# Allegro board Sensor_RevA-DBG.brd
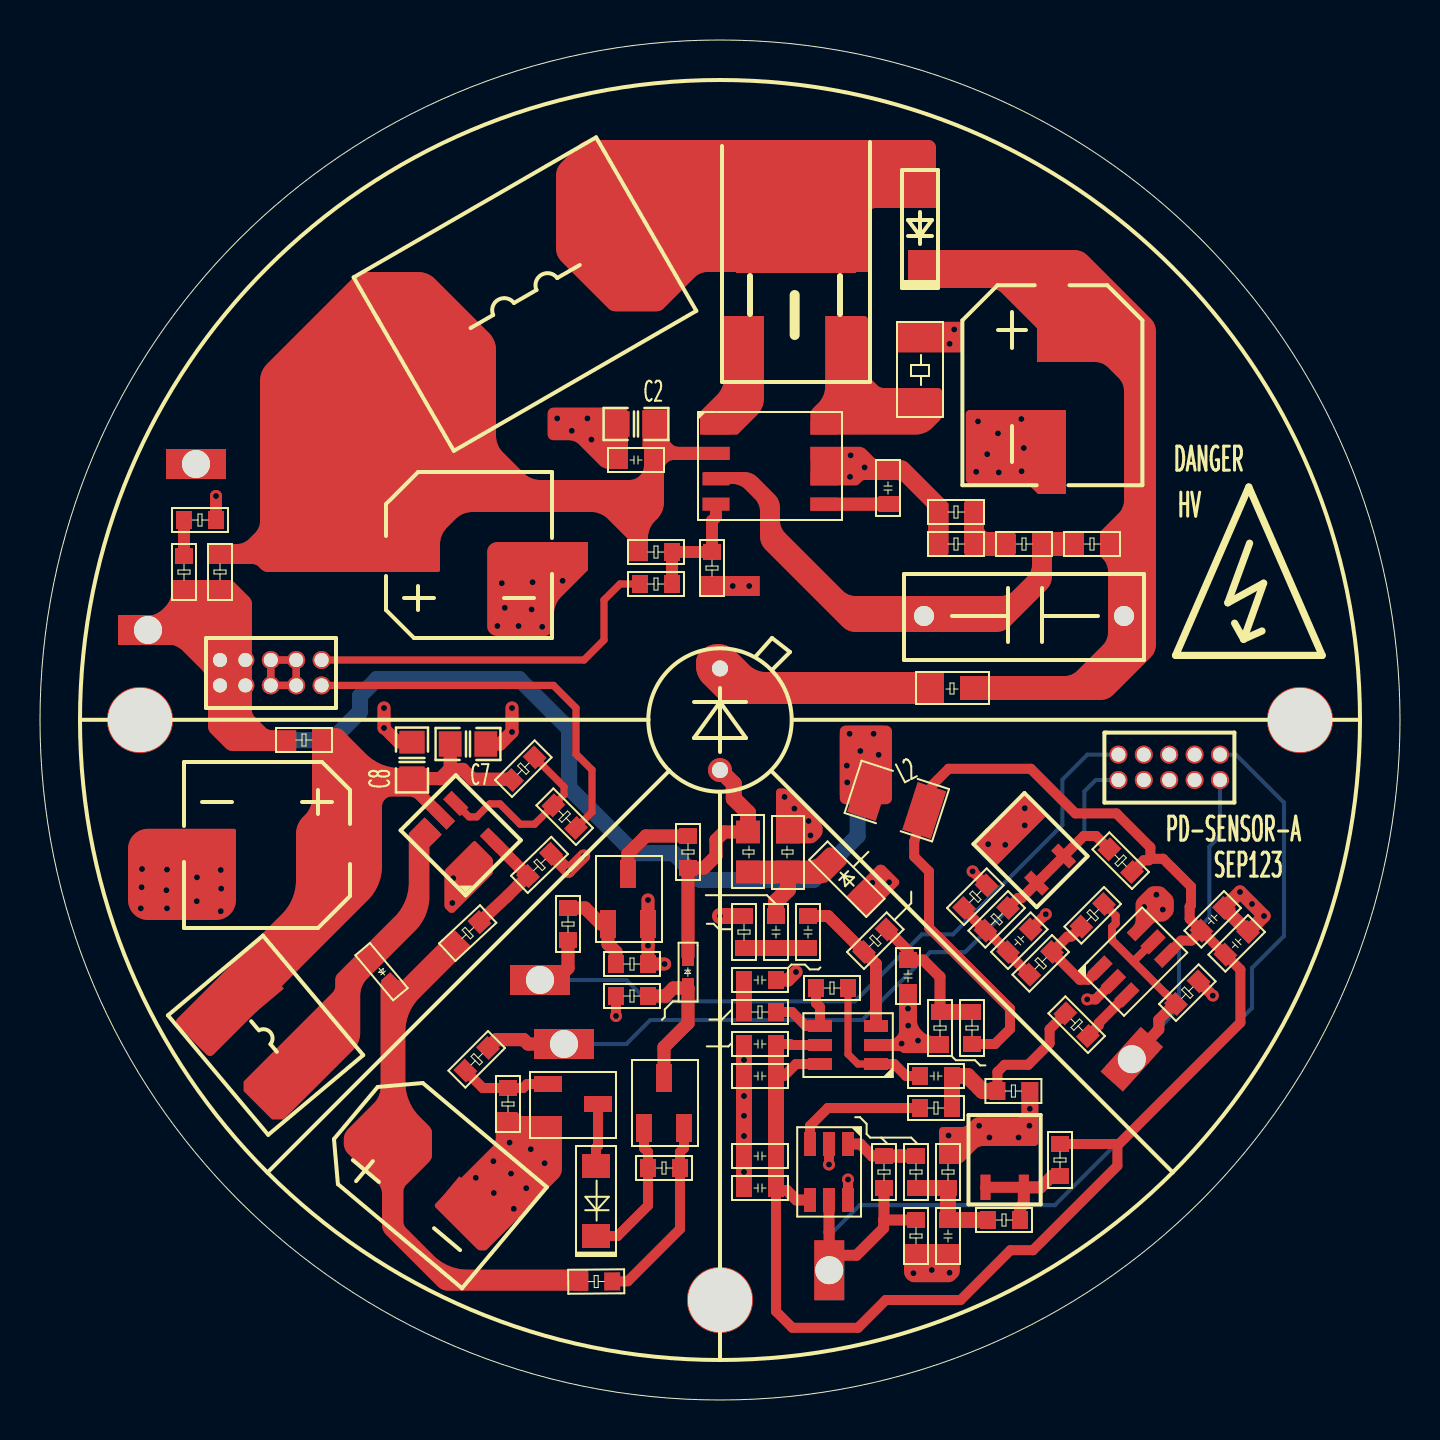
[diagram p0: board, top side]
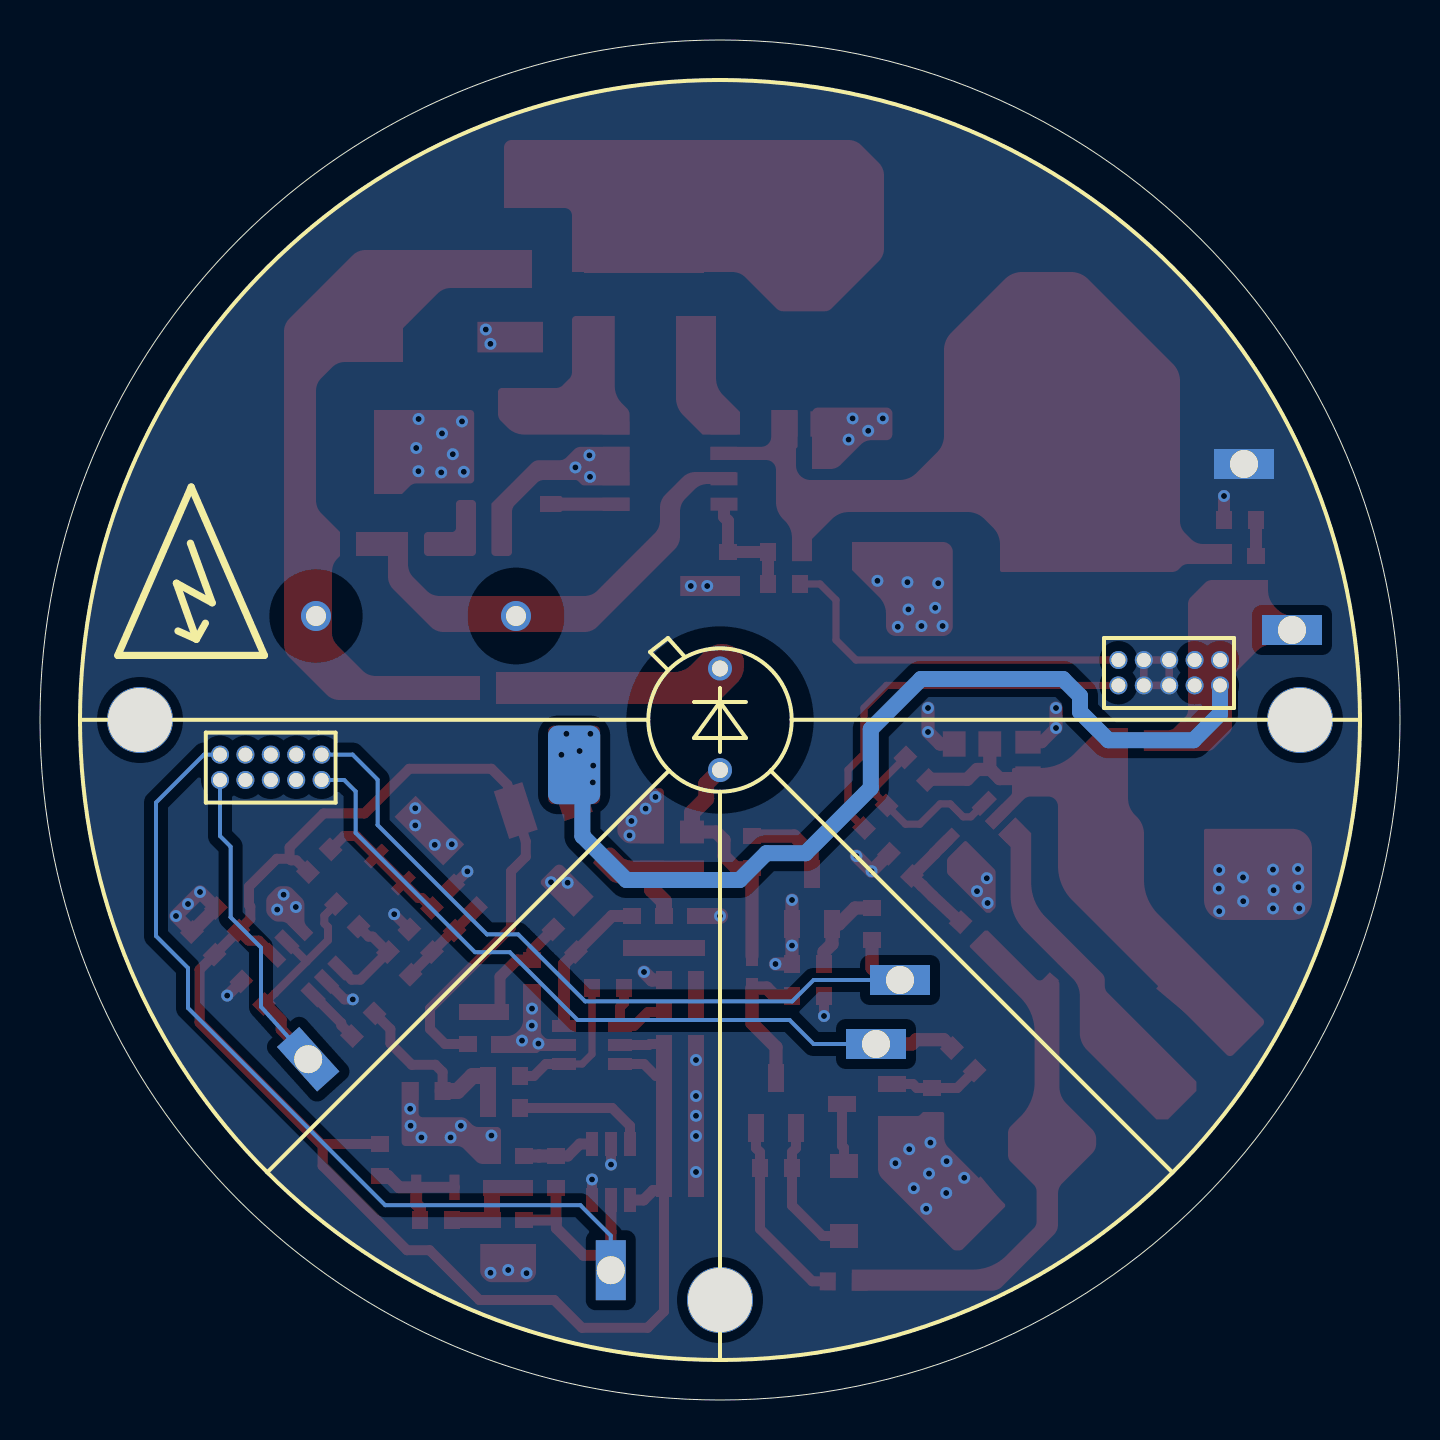
[diagram p1: board, bottom side, seen from below]

Outline 68 x 68 mm; copper layers: TOP, BOTTOM. Coordinates in mm from the lower left corner of the outline.
Outline path: circle c34,34 r34

## Design rules (mm)
constraint set DEFAULT: 

## Placement (name value [footprint] x y rotation side)
C1  4.7uF/400V  [CAP-SMD-D8D0-L10D3-B8D3]  50.6 54 270 top
C2  10uF/35V  [C0805]  29.8 48.8 180 top
C3  0.1uF/35V  [C0603]  30.6 47 180 top
C4  0.1uF/35V  [C0603]  42.4 44.8 90 top
C5  220uF/35V  [CAP-SMD-D8D0-L8D3-W8D3-P7D5]  17.8 42.2 0 top
C6  0.1uF/400V  [CAP-THR-L11D4-W3D8-P10D0-D0D8]  54.2 39.2 180 top
C7  10uF/35V  [C0805]  21.4 32.8 0 top
C8  10uF/35V  [C0805]  18.6 32 90 top
C9  220uF/35V  [CAP-SMD-D8D0-L8D3-W8D3-P7D5]  15 27.8 180 top
C10  10uF/16V  [C0603]  59.2 24.6 225 top
C11  0.1uF/16V  [C0603]  36.8 22.6 90 top
C12  0.1uF/16V  [C0603]  38.4 24.2 270 top
C13  0.1uF/16V  [C0603]  48.4 22.4 45 top
C14  0.1uF/16V  [C0603]  60.4 23.4 225 top
C15  0.1uF/16V  [C0603]  43.4 22 270 top
C16  0.1uF/16V  [C0603]  35.2 21 0 top
C17  0.1uF/16V  [C0603]  36.8 17.8 180 top
C18  10uF/16V  [C0603]  36.8 16.2 180 top
C19  0.1uF/16V  [C0603]  45.6 16.2 180 top
C20  0.1uF/16V  [C0603]  36.8 12.2 180 top
C21  100uF/35V  [CAP-SMD-L6D6-W6D6-P5D5-MM]  17.4 13 320 top
C22  10uF/16V  [C0603]  36.8 10.6 180 top
C23  0.1uF/16V  [C0603]  45.4 9 270 top
D1  E1G  [SOD-123FL]  44 56.8 90 top
D2  LED  [R0603]  8.8 44 180 top
D3  SAPD  [SAPD-THR-2P]  34 34 90 top
D4  PTVSLC3D3V3B  [SOD323-L1D8-W1D3-P2D4-MM]  41.2 25.2 135 top
D5  BAS521-7  [SOD-523-L1D2-W0D8-P1D6-MM]  17.6 20.8 130 top
D6  BAS521-7  [SOD-523-L1D2-W0D8-P1D6-MM]  32.4 22.2 270 top
D7  MMSZ12T1G  [SOD-123-L2D8-W1D8-P3D5-MM]  27.8 8.2 90 top
J1  Conn-2x5  [CONN-2X5-1D27]  9 37 0 top
J2  Conn-2x5  [CONN-2X5-1D27]  53.92 32.27 0 top
L1  100uH/2A  [IND-SMD-L11D5-W10D0-P10D4]  19.8 52.6 30 top
L2  10uH/300mA  [L1210]  44.71 30.68 162 top
L3  47uH/1A  [IND-SMD-L5D0-W5D0-P4D6-MM]  9.8 20 310 top
NOREF  -  [unnamed]  63 34 0 top
NOREF#2  -  [#2]  1.06 42.42 0 top
NOREF#3  -  [#2]  5 34 0 top
NOREF#4  -  [#2]  5 34 0 top
NOREF#5  -  [#2]  3.87 44.79 0 top
NOREF#6  -  [#2]  64.24 35.01 0 top
NOREF#7  -  [unnamed]  5 34 0 top
NOREF#8  -  [unnamed]  34 5 0 top
NOREF#9  -  [#2]  34 5 90 top
Q1  IRF644PBF  [TO-252-2-DPAK]  37.8 59.6 90 top
Q2  FH3400C  [SOT-23-3-L2D9-W1D3-P1D9-MM]  30.4 23.8 270 top
Q3  AO3401A  [SOT-23-3-L2D9-W1D3-P1D9-MM]  32.2 13.6 270 top
Q4  FH3400C  [SOT-23-3-L2D9-W1D3-P1D9-MM]  25.4 13.8 180 top
R1  50mR  [R1206]  44 50 90 top
R2  DNP  [R0603]  46.6 44.4 180 top
R3  6.81K  [R0603]  46.6 42.8 180 top
R4  2.4K  [R0603]  50 42.8 180 top
R5  1.5M  [R0603]  53.4 42.8 180 top
R6  DNP  [R0603]  30 42.4 0 top
R7  0  [R0603]  33.6 40.8 90 top
R8  0  [R0603]  7.2 40.6 90 top
R9  0  [R0603]  9 42.2 270 top
R10  DNP  [R0603]  30 40.8 0 top
R11  0  [R0805]  44.6 35.6 0 top
R12  0  [R0603]  12.4 33 0 top
R13  10K  [R0603]  23.6 31 45 top
R14  0  [R0603]  26.8 28.6 135 top
R15  332K  [R0805]  35.4 26.4 90 top
R16  0  [R0603]  32.4 28.2 270 top
R17  100K  [R0805]  37.4 28.4 270 top
R18  499  [R0603]  54.6 26.4 135 top
R19  10K  [R0603]  24.4 26.2 44 top
R20  4.99K  [R0603]  46.2 24.6 45 top
R21  DNP  [R0603]  53.2 24.8 225 top
R22  4.99K  [R0603]  48.4 24.6 225 top
R23  100  [R0603]  26.4 23 90 top
R24  100K  [R0603]  35.2 22.6 90 top
R25  182K  [R0603]  20.8 22.8 43 top
R26  100K  [R0603]  41.2 22.4 45 top
R27  1K  [R0603]  50.6 22.4 225 top
R28  1K  [R0603]  28.8 21.8 0 top
R29  100K  [R0603]  40.4 20.6 180 top
R30  10K  [R0603]  56.8 19.8 45 top
R31  1M  [R0603]  28.8 20.2 0 top
R32  10K  [R0603]  35.2 19.4 0 top
R33  0  [R0603]  52.4 18.2 135 top
R34  4.99K  [R0603]  45 17.8 90 top
R35  4.99K  [R0603]  46.6 19.4 270 top
R36  100  [R0603]  22.4 17.6 225 top
R37  100K  [R0603]  49.47 15.45 180 top
R38  1K  [R0603]  23.4 15.6 270 top
R39  0  [R0603]  44 14.6 0 top
R40  499  [R0603]  51 12.8 270 top
R41  1K  [R0603]  32 11.6 180 top
R42  DNP  [R0603]  42.2 10.6 90 top
R43  1K  [R0603]  43.8 12.2 270 top
R44  4.99K  [R0603]  45.4 10.6 90 top
R45  4.99K  [R0603]  49 9 180 top
R46  10K  [R0603]  43.8 9 270 top
R47  0  [R0603]  28.61 5.93 180.5 top
TP1  T POINT F  [STAMP_HOLE_1D5X3D0_1D4]  5.4 38.5 270 top
TP3  T POINT F  [STAMP_HOLE_1D5X3D0_1D4]  7.8 46.8 270 top
TP4  RESET  [STAMP_HOLE_1D5X3D0_1D4]  25 21 90 top
TP5  QUENCH  [STAMP_HOLE_1D5X3D0_1D4]  26.2 17.8 270 top
TP6  PULSE2  [STAMP_HOLE_1D5X3D0_1D4]  54.59 17.04 138 top
TP7  PULSE  [STAMP_HOLE_1D5X3D0_1D4]  39.46 6.49 180 top
U1  MAX1771ESA+  [SO-8]  39.2 48.6 270 top
U2  MAX5026EUT-T  [SOT23-6]  21 28.2 45 top
U3  TL431  [SOT-23-3-TL431]  49.8 25.2 45 top
U4  TLV3501AIDBVR  [SOT-23-6-L2D9-W1D6-PD0D95-CD2D8-MM]  53 21.6 45 top
U5  OPA357AIDBVR  [SOT-23-6-L2D9-W1D6-PD0D95-CD2D8-MM]  41.8 16.8 180 top
U6  TL431  [SOT-23-3-TL431]  46.8 10.2 0 top
U7  TLV3501AIDBVR  [SOT-23-6-L2D9-W1D6-PD0D95-CD2D8-MM]  40.4 12.8 270 top

## Library data of the parts
C1 C5 C6 C9 C21 = C
C2-C4 C7 C8 C10-C20 C22 C23 = CAP NP
D1 D3 D5 D6 = DIODE
D2 = LED
D4 = DIODE SCHOTTKY
D7 = DIODE ZENER
J1 J2 = Conn-2x5
L1-L3 = INDUCTOR
Q1 = IRF644PbF
Q2 Q4 = FH3400C
Q3 = BSP316P_0
R1-R47 = R
TP1 TP3-TP7 = T POINT F
U1 = MAX1771ESA+
U2 = MAX5026EUT-T
U3 U6 = TL431/TI
U4 U7 = TLV3501AIDBVR
U5 = OPA357AIDBVR

## Footprints (pads in the part's own frame, mm; a bottom-side part is the same pattern mirrored in y, then rotated)
C0603
  rect 0.8x0.9 smd: 1(0,0) 2(1.6,0)
C0805
  rect 1.141x1.27 smd: 1(-0.889,0) 2(0.889,0)
CAP-SMD-D8D0-L8D3-W8D3-P7D5
  rect 4.2x1.4 smd: 1(0,0) 2(7.5,0)
CAP-SMD-D8D0-L10D3-B8D3
  rect 4.2x1.4 smd: 1(0,0) 2(6.6,0)
CAP-SMD-L6D6-W6D6-P5D5-MM
  rect 3.2x1.8 smd: 1(0,0) 2(5.5,0)
CAP-THR-L11D4-W3D8-P10D0-D0D8
  round 1.5 hole 1: 1(0,0) 2(10,0)
CONN-2X5-1D27
  round 0.9 hole 0.7: 1(0,0) 2(0,-1.27) 3(1.27,0) 4(1.27,-1.27) 5(2.54,0) 6(2.54,-1.27) 7(3.81,0) 8(3.81,-1.27) 9(5.08,0) 10(5.08,-1.27)
IND-SMD-L5D0-W5D0-P4D6-MM
  rect 2.2x4.4 smd: 1(0,0) 2(4.6,0)
IND-SMD-L11D5-W10D0-P10D4
  rect 3x6 smd: 1(0,0) 2(10.4,0)
L1210
  rect 1.5x2.5 smd: 1(0.1,1.3) 2(3,1.3)
R0603
  rect 0.8x0.9 smd: 1(0,0) 2(1.6,0)
R0805
  rect 1.14x1.2 smd: 1(0,0) 2(2,0)
R1206
  rect 1.2x1.8 smd: 1(0,0) 2(3,0)
SAPD-THR-2P
  round 1.2 hole 0.8: 1(2.576,0) 2(-2.504,0)
SO-8
  rect 0.65x1.35 smd: 1(0,-5.4) 2(1.27,-5.4) 3(2.54,-5.4) 4(3.81,-5.4) 5(3.81,0) 6(2.54,0) 7(1.27,0) 8(0,0)
SOD323-L1D8-W1D3-P2D4-MM
  rect 1.2x0.6 smd: 1(0,0) 2(2.4,0)
SOD-123-L2D8-W1D8-P3D5-MM
  rect 1.2x1.4 smd: 1(0,0) 2(3.5,0)
SOD-123FL
  rect 1.4x1.2 smd: 1(0,0) 2(3.6,0)
SOD-523-L1D2-W0D8-P1D6-MM
  rect 1x0.6 smd: 1(0,0) 2(1.6,0)
SOT23-6
  rect 0.6x1.2 smd: 1(-0.9,-1.3) 2(0.05,-1.3) 3(1,-1.3) 4(1,1.3) 5(0.05,1.3) 6(-0.9,1.3)
SOT-23-3-L2D9-W1D3-P1D9-MM
  rect 1.4x0.8 smd: 1(0,-2) 2(0,0) 3(-2.5,-1)
SOT-23-3-TL431
  rect 0.51x1.27 smd: 1(0.476,0.434) 2(1.415,3.142) 3(2.391,0.434)
SOT-23-6-L2D9-W1D6-PD0D95-CD2D8-MM
  rect 1.2x0.6 smd: 1(0,0) 2(0,-0.95) 3(0,-1.9) 4(2.8,-1.9) 5(2.8,-0.95) 6(2.8,0)
STAMP_HOLE_1D5X3D0_1D4
  rect 1.5x3 hole 1.4: 1(0,0)
TO-252-2-DPAK
  rect 2.8x1.4 smd: 1(-6.82,2.34) 3(-6.82,-2.21)
  rect 6.5x6 smd: 2(0,0)
unnamed
  round 3.3 hole 3.2 unplated: (0,0)

## Nets
GND: C1.2 C2.2 C3.2 C4.2 C5.2 C7.2 C8.2 C9.2 C10.1 C13.2 C14.1 C15.2 C16.2 C17.2 C18.2 C20.2 C21.2 C22.2 C23.2 D2.1(CATHODE) D4.1 J1.5 J1.6 J1.7 J1.8 Q2.2(S) Q4.2(S) R1.2 R2.2 R3.2 R7.1 R17.1 R19.2 R20.2 R24.2 R28.2 R30.2 R31.1 R34.1 R37.1 R38.2 R44.2 R46.2 TP3.1(TP) U1.6 U1.7 U2.1 U2.2 U3.2 U4.2(V-) U4.6 U5.2(V-) U6.2 U7.2(V-) U7.6
VDD5: J1.1 J1.2 J1.3 J1.4 L2.2 R8.1 R9.2 R12.1 TP1.1(TP)
VDD5_QUENCH: C10.2 C14.2 C17.1 C18.1 C20.1 C22.1 L2.1 R18.1 R35.2 R40.1 U4.4 U5.5 U5.6 U7.4
AUX_PWR_EN: J1.10 R14.1
HVPS_EN: J1.9 R10.1
PULSE: J2.9 R42.1 R46.1 TP7.1(TP) U7.5
PULSE2: J2.10 R21.1 R30.1 TP6.1(TP) U4.5
PWR_IC: C2.1 C3.1 C5.1 L1.1 R6.1 R9.1 U1.2(V+)
QUENCH_VOLTAGE_DOWN: J2.2 R36.1 TP5.1(TP)
RESET_DISCHARGE: J2.1 R23.1 TP4.1(TP)
VBIAS: C1.1 C6.1 D1.1(K) R5.1 R11.2
VQUENCH: C21.1 D5.1(K) R25.1 R47.2
N00177: Q1.1 U1.1
N00181: Q1.3(S) R1.1 U1.8
N00224: D1.2 L1.2 Q1.2
N00671: C4.1 U1.5
N03183: R6.2 R7.2 R10.2 U1.4
N281531: C6.2 R4.1 R5.2 U1.3
N361468: R2.1 R3.1 R4.2
N365385: C7.1 C8.1 C9.1 L3.1 R12.2 R13.1 U2.5(VCC)
N365393: D5.2 L3.2 U2.6
N365573: R13.2 R14.2 U2.4
N365581: R19.1 R25.2 U2.3
N370892: Q3.2(S) R41.1 R47.1
N370992: D7.1(CATHODE) Q3.1 R41.2
N371048: D7.2 Q4.3
N371052: D3.2 D6.1(K) R15.2 R16.2
N371122: D6.2 Q3.3 R31.2
N371190: Q4.1 R36.2 R38.1
N371268: C11.2 D4.2(CATHODE) R15.1 R17.2
N371272: Q2.3 R16.1
N371414: Q2.1 R23.2 R28.1
N371666: C11.1 C12.2 R24.1
N371974: C23.1 R43.2 R44.1 R45.2
N372066: R40.2 R45.1 U6.1(REF) U6.3
N379806: C15.1 R26.2 R34.2 R35.1
N380805: C12.1 R26.1 U5.3
N381019: R29.2 R32.2 U5.4
N381074: C19.2 R29.1 U5.1
N381200: C16.1 R32.1
N382559: C19.1 R33.2 R37.2 R39.2
N382943: D3.1(K) R11.1
N497700: R42.2 R43.1 U7.1
N497855: R39.1 U7.3
N499181: R21.2 R27.1 U4.1
N500750: C13.1 R20.1 R22.2 R27.2
N500844: R18.2 R22.1 U3.1(REF) U3.3
N502146: R33.1 U4.3
N503396: D2.2 R8.2

Pads without a net: J2 3 4 5 6 7 8

## Via types
v1: diameter 0.6, hole 0.3, TOP to BOTTOM, 109 vias

## Routing (per net, layer and track width the routed paths; a pad name or vN(x,y) marks a point on that pad's centre or on a via; arc(x,y) is an arc through that point)
GND: length 41.1
  TOP w0.38: J1.5 J1.7 J1.8 J1.6 J1.5
  TOP w0.5: U4.2 52.77,20.03 v1(52.36,20.03) ; R31.1 v1(28.8,19.2) ; U7.6 v1(40.4,11.03) ; R20.2 v1(46.63,26.43) ; C13.2 v1(50.29,24.29) ; U7.2 v1(39.45,11.77)
  TOP w0.55: R30.2 v1(58.64,20.22)
  TOP w0.6: D2.1 v1(8.8,45.2) ; v1(17.2,33.6) 17.91,32.89 C8.2
  TOP w0.66: v1(30.4,25) Q2.2 v1(30.4,22.72) 30.4,22.72 R28.2 v1(31.23,21.8) ; v1(23.6,34.6) v1(23.6,33.4) 23,32.8 C7.2 ; v1(37.8,21.4) 37.4,21 C16.2 ; v1(17.2,33.6) v1(17.2,34.6) ; R19.2 v1(26.42,26.44) v1(27.18,27.2) ; C14.1 v1(61.2,24.2) v1(60.6,24.8) v1(60,25.4) C10.1 C14.1
  TOP w0.8: C22.2 v1(35.2,11.4) C20.2 v1(35.2,13.2) v1(35.2,14.21) 35.2,14.71 v1(35.2,15.2) C18.2 v1(35.2,17) C17.2 ; R24.2 v1(34,24.2)
  vias: v1(5.04,24.58) v1(5.1,26.55) v1(5.08,25.64) v1(6.32,25.49) v1(6.35,26.52) v1(6.35,24.58) v1(7.84,24.94) v1(7.85,26.13) v1(9.04,26.5) v1(9.04,24.44) v1(9.06,25.57) v1(20.62,24.85) v1(20.66,26.09) v1(21.15,25.44) v1(21.79,11.11) v1(22.67,11.94) v1(22.69,10.35) v1(22.87,38.7) v1(23.09,40.84) v1(23.24,39.61) v1(23.48,12.87) v1(23.55,11.32) v1(23.69,9.56) v1(23.93,38.7) v1(24.31,10.59) v1(24.54,12.54) v1(24.63,40.89) v1(24.58,39.53) v1(25.11,38.66) v1(25.23,11.84) v1(25.86,49.08) v1(26.13,40.96) v1(26.59,48.46) v1(27.37,49.08) v1(27.57,48.02) v1(34.64,40.7) v1(35.46,40.7) v1(37.23,30.15) v1(37.72,29.57) v1(38.43,28.95) v1(38.52,28.23) v1(40.53,47.23) v1(40.5,46.16) v1(41.23,46.63) v1(41.62,25.86) v1(42.45,25.89) v1(43.08,17.82) v1(43.4,19.57) v1(43.41,18.72) v1(43.67,6.34) v1(43.9,17.97) v1(44.59,6.5) v1(45.43,13.22) v1(45.48,52.81) v1(45.48,6.36) v1(45.71,53.53) v1(46.81,46.41) v1(46.9,48.93) v1(46.96,13.71) v1(47.36,47.29) v1(47.41,27.79) v1(47.47,13.13) v1(47.9,48.33) v1(47.94,46.38) v1(48.26,27.76) v1(48.93,13.13) v1(49.07,49.05) v1(49.08,46.44) v1(49.19,47.6) v1(49.24,29.59) v1(49.24,28.73) v1(49.49,14.56) v1(49.47,13.71) v1(55.21,24.65) v1(55.82,25.26) v1(56.14,24.52)
VDD5: length 57.2
  TOP w0.36: J1.1 J1.3 J1.4 J1.2 J1.1
  BOTTOM w0.5: v1(40.36,30.88) 40.36,30.7 40.88,30.18 ; v1(41.68,33.31) 41.93,33.06 v1(41.93,32.26) ; v1(40.34,31.72) 40.5,31.56 40.64,31.56 41.04,31.16 41.04,30.99 41.36,30.66 ; 41.93,31.23 41.02,32.14 v1(41.02,32.45)
  BOTTOM w0.8: v1(41.93,32.26) 41.93,31.23 40.88,30.18 40.88,28.2 38.68,26 33.02,26 31.68,27.34 29.72,27.34 26.46,30.6 26.46,33.54 23.95,36.05 16.85,36.05 16,35.2 16,34.41 14.58,32.99 10.32,32.99 9,34.31 J1.2
  vias: v1(40.48,33.31)
VDD5_QUENCH: length 97.2
  TOP w0.5: C17.1 37.51,17.8 37.56,17.75 U5.5 ; C18.1 37.2,16.2 37.8,16.8 U5.6 ; R18.1 55.18,26.98 55.44,26.98 55.52,27.06 ; 53.87,12.72 53.79,12.8 R40.1 ; 53.87,12.72 60.02,18.87 60.02,21.52 C14.2 C10.2 ; 53.87,12.72 53.87,11.71 49.65,7.49 48.52,7.49 46.03,5 42.29,5 40.9,3.61 37.62,3.61 36.8,4.43 C22.1 ; C10.2 57.48,24.05 57.48,24.67 57.55,24.74 57.55,25.67 56.16,27.06 55.52,27.06 ; C10.2 57.57,22.97 57.06,22.97 U4.4 ; 55.52,27.06 55.52,27.63 53.82,29.33 51.77,29.33 49.54,31.56 45.43,31.56 44.63,30.77 L2.1 43.71,27.93 43.71,27.17 44.45,26.43 44.45,23.62 48.5,19.57 48.5,18.55 47.75,17.8 R35.2
  TOP w0.55: 36.8,10.47 37.35,10.47 37.82,10 U7.4
  TOP w0.8: C17.1 C18.1 C20.1 C22.1
AUX_PWR_EN: length 19.9
  TOP w0.36: J1.10 25.67,35.73 26.8,34.6 26.8,32.31 27.6,31.51 27.6,29.4 R14.1
HVPS_EN: length 18.7
  TOP w0.36: R10.1 29,40.8 28.2,40 28.2,38 27.2,37 J1.9
PULSE: length 53.1
  TOP w0.5: 39.46,7.24 TP7.1
  TOP w0.55: 42.18,9 R46.1 ; 42.18,9 42.18,8.59 40.83,7.24 39.46,7.24 39.46,8.37 39.45,8.38 U7.5 ; 42.18,9 42.2,9.02 R42.1
  BOTTOM w0.2: J2.9 59.8,32.27 62.2,29.87 62.2,23.2 60.6,21.6 60.6,19.6 50.74,9.74 40.98,9.74 39.46,8.22 TP7.1
PULSE2: length 27.4
  TOP w0.4: R21.1 53.78,24.22 53.78,23.83 53.6,23.65 53.6,22.99 54.67,21.92 ; 56.76,19.84 56.26,20.34 56.26,20.34 54.67,21.92 ; 54.67,21.92 U4.5
  TOP w0.5: R30.1 56.76,19.84
  TOP w0.55: TP6.1 55.85,18.43 55.94,18.53 55.94,19.01 56.76,19.84
  BOTTOM w0.2: J2.10 59,28.2 58.47,27.67 58.47,24.14 56.95,22.62 56.95,19.66 TP6.1
QUENCH_VOLTAGE_DOWN: length 38.5
  TOP w0.66: R36.1 22.82,18.02 24.18,18.02 24.4,17.8 TP5.1
  BOTTOM w0.2: J2.2 52.79,31 52.22,30.43 52.22,28.36 46.25,22.39 44.51,22.39 41.12,19 30.52,19 29.32,17.8 TP5.1
RESET_DISCHARGE: length 38.9
  TOP w0.66: R23.1 26.4,21.6 25.8,21 TP4.1
  BOTTOM w0.2: TP4.1 29.32,21 30.39,19.93 40.74,19.93 44.09,23.28 45.65,23.28 51.12,28.75 51.12,31.02 52.37,32.27 J2.1
N03183: length 6.1
  TOP w0.6: R10.2 R6.2 32.84,42.4 32.84,42.4 R7.2 33.6,43.96 33.8,44.16 U1.4
N365385: length 6.7
  TOP w0.66: 18.64,31.07 20.02,31.07 20.47,31.53 ; 20.47,31.53 21.14,31.53 21.63,31.04 23.56,31.04 R13.1 ; 20.47,31.53 20.51,31.56 C7.1
N365573: length 9.5
  TOP w0.36: R13.2 26.2,30.66 26.2,30.27 R14.2 24.73,28.79 24.01,28.79 22.99,29.81 22.49,29.81 21.84,29.16 21.46,29.16 U2.4
N365581: length 5.9
  TOP w0.6: U2.3 23.27,27.35 23.27,27.33 R19.1 23.89,25.71 23.88,25.71 23.37,25.2 R25.2
N370892: length 9.6
  TOP w0.5: R47.1 29.39,5.94 32,8.55 R41.1 32,12.39 32.2,12.59 Q3.2
N370992: length 7.2
  TOP w0.5: Q3.1 30.2,12.59 30.4,12.39 R41.2 30.4,9.72 28.88,8.2 D7.1
N371048: length 3.1
  TOP w0.5: Q4.3 27.9,12.71 27.8,12.61 D7.2
N371052: length 12.3
  TOP w0.66: D6.1 R16.2 33.2,26.6 33.8,27.2 33.8,28 34.2,28.4 R15.2
  TOP w0.8: R15.2 35.4,29.36 34.69,30.07 34.69,30.81 D3.2
N371122: length 7.2
  TOP w0.66: Q3.3 31.2,17.64 32.4,18.84 D6.2 31.67,20.6 31.27,20.2 R31.2
N371190: length 4.6
  TOP w0.5: Q4.1 24.36,15.8 24.16,15.6 R38.1 22.14,15.6 R36.2
N371268: length 2.4
  TOP w0.8: R17.2 37.4,25.52 36.8,24.92 C11.2
N371272: length 4.4
  TOP w0.66: Q2.3 29.4,27.31 30.29,28.2 R16.1
N371414: length 4.5
  TOP w0.66: R28.1 28.8,22.4 28.4,22.8 Q2.1 28.05,23.8 27.25,24.6 R23.2
N371666: length 3.2
  TOP w0.8: R24.1 C11.1 37.64,22.6 37.64,22.6 C12.2
N371974: length 5.2
  TOP w0.8: R45.2 C23.1 R44.1 44.64,10.6 44.64,10.6 R43.2
N372066: length 5.7
  TOP w0.55: U6.1 U6.3
  TOP w0.6: R40.2 50.6,11.2 50.03,10.63 U6.3 49.19,9.8 49,9.61 R45.1
N379806: length 7.3
  TOP w0.55: R26.2 43.4,22.46 C15.1 44.16,22 45,21.16 R34.2
  TOP w0.8: R35.1 45.76,19.4 45.76,19.4 R34.2
N380805: length 7.5
  TOP w0.6: C12.1 39.4,24.2 R26.1 41.8,21.8 U5.3
N381019: length 4.5
  TOP w0.5: R32.2 37.6,19.4 38.3,18.7 U5.4 39,19.64 38.8,19.84 R29.2
N381074: length 7.4
  TOP w0.36: R29.1 40.4,17.29 40.89,16.8 U5.1
  TOP w0.5: U5.1 42.71,16.8 43.31,16.2 C19.2
N381200: length 1.6
  TOP w0.8: R32.1 C16.1
N382559: length 10.2
  TOP w0.5: R37.2 47.87,16.4 48.23,16.76 49.41,16.76 50.48,17.83 50.48,18.54 R33.2
  TOP w0.8: R37.2 47.13,15.45 46.38,16.2 C19.1 45.6,15.36 45.6,15.36 R39.2
N497700: length 3.6
  TOP w0.55: R42.2 41.61,12.2 41.01,12.8 U7.1
  TOP w0.66: R43.1 43.04,12.2 43.04,12.2 R42.2
N497855: length 6.8
  TOP w0.5: U7.3 38.5,13.71 39.39,14.6 R39.1
N499181: length 5.2
  TOP w0.5: R21.2 51.57,23.17 51.37,23.17 R27.1 51.98,21.02 52.42,21.02 U4.1
N500750: length 4.7
  TOP w0.5: R27.2 48.4,22.34 C13.1 47.33,23.47 R22.2 46.2,24.54 R20.1
N500844: length 6.8
  TOP w0.5: R22.1 48.9,25.1 49.09,25.1 U3.1 U3.3 52.19,28.2 52.8,28.2 R18.2
N502146: length 2.9
  TOP w0.5: R33.1 52.94,18.74 52.94,18.85 U4.3
N503396: length 1.8
  TOP w0.6: D2.2 7.2,43.24 7.2,43.24 R8.2

## Copper pours and planes (outline as drawn; the poured copper is in the pictures)
GND on TOP (solid shape): 35.99,40.2 33,40.2 33,41.2 35.99,41.2
GND on TOP (solid shape): 46.13,52.38 42.85,52.38 42.85,53.91 46.13,53.91
GND on TOP (solid shape): 50.27,29.16 47.84,26.73 46.79,27.78 49.22,30.21
GND on TOP (solid shape): 41.83,26.68 42.04,26.77 42.25,26.68 42.9,26.03 42.96,25.88 42.9,25.74 41.32,24.16 40.31,25.16
GND on TOP (solid shape): 51.3,45.3 49.9,45.3 49.51,45.69 49.35,45.79 49.17,45.83 46.49,45.83 46.35,45.89 46.29,46.03 46.29,49.3 46.35,49.44 46.49,49.5 51.3,49.5
GND on TOP (solid shape): 43.85,19 43.91,18.72 44.06,18.49 44.14,18.41 44.37,18.26 44.65,18.2 45.45,18.2 45.45,17.35 43.17,17.35 43.12,17.36 43.08,17.39 43.06,17.41 43.02,17.44 42.97,17.45 41.2,17.45 41.2,18.05 42.59,18.05 42.68,18.07 42.76,18.12 42.88,18.24 42.93,18.32 42.95,18.41 42.95,20.8 43.85,20.8
GND on TOP (solid shape): 23.98,14.27 24.06,14.22 24.15,14.2 26.1,14.2 26.1,11.58 26.04,11.3 25.89,11.07 22.37,7.55 22.29,7.5 22.2,7.48 22.03,7.48 21.94,7.5 21.86,7.55 19.78,9.63 19.75,9.67 19.75,9.78 19.78,9.82 22.58,12.62 22.73,12.85 22.79,13.13 22.79,14.3 22.82,14.37 22.89,14.4 23.85,14.4
GND on TOP (solid shape): 49.92,12.9 49.86,12.76 49.72,12.7 47.15,12.7 46.97,12.66 46.81,12.56 46.19,11.94 46.03,11.84 45.85,11.8 44.95,11.8 44.95,13.45 45.01,13.59 45.15,13.65 46.07,13.65 46.25,13.69 46.41,13.79 46.62,14 46.78,14.1 46.96,14.14 48.87,14.14 49.01,14.2 49.07,14.34 49.07,15.9 49.92,15.9
GND on TOP (solid shape): 40.95,47.66 41.13,47.62 41.29,47.52 41.68,47.13 41.84,47.03 42.02,46.99 43.06,46.99 43.24,46.95 43.4,46.85 45.43,44.82 45.43,42.4 45.37,42.26 45.23,42.2 44.6,42.2 44.46,42.26 44.4,42.4 44.4,44.41 44.36,44.59 44.26,44.75 43.15,45.86 42.99,45.96 42.81,46 41.25,46 41.16,45.98 41.08,45.93 40.95,45.8 40.87,45.75 40.78,45.73 38.52,45.73 38.52,47.66
GND on BOTTOM: 2,34 66,34
VDD5 on TOP (solid shape): 9.4,41 9.58,40.96 9.74,40.86 10.46,40.14 10.56,39.98 10.6,39.8 10.6,34.49 10.64,34.31 10.74,34.15 11.26,33.63 11.42,33.53 11.6,33.49 12.81,33.49 12.81,32.45 9.63,32.45 9.45,32.49 9.29,32.59 8.54,33.34 8.44,33.5 8.4,33.68 8.4,35.7 8.31,36.16 8.05,36.55 7.15,37.45 6.76,37.71 6.3,37.8 5.2,37.8 5.2,39.2 5.3,39.2 5.76,39.29 6.15,39.55 6.25,39.65 6.51,40.04 6.6,40.5 6.6,41
PWR_IC on TOP (solid shape): 18.9,56.4 19.36,56.31 19.75,56.05 22.45,53.35 22.71,52.96 22.8,52.5 22.8,48.23 22.89,47.77 23.15,47.38 24.18,46.35 24.57,46.09 25.03,46 29.47,46 29.75,46.06 29.98,46.21 29.99,46.22 30.14,46.45 30.2,46.73 30.2,47.55 30.2,47.57 30.19,47.58 30.13,47.64 30.12,47.65 30.12,47.67 30.12,49.5 31.44,49.5 31.44,48.16 31.59,47.81 31.94,47.66 34.48,47.66 34.48,47 31.7,47 31.35,46.85 31.2,46.5 31.2,44.9 31.11,44.44 30.85,44.05 30.75,43.95 30.49,43.56 30.4,43.1 30.4,41.94 29.4,41.94 29.4,43.05 28.4,44.05 28.01,44.31 27.55,44.4 21.63,44.4 21.17,44.31 20.78,44.05 20.35,43.62 20.09,43.23 20,42.77 20,41.5 19.97,41.43 19.9,41.4 11.4,41.4 11.22,41.44 11.06,41.54 10.94,41.66 10.78,41.76 10.6,41.8 8.4,41.8 8.4,42.8 9.85,42.8 10.17,42.86 10.45,43.05 10.75,43.35 10.94,43.63 11,43.95 11,50.95 11.09,51.41 11.35,51.8 15.6,56.05 15.99,56.31 16.45,56.4
VBIAS on TOP (solid shape): 51.72,57.5 52.07,57.43 52.37,57.23 55.53,54.07 55.73,53.77 55.8,53.42 55.8,37.78 55.73,37.43 55.53,37.13 53.67,35.27 53.37,35.07 53.02,35 46,35 46,36.2 51.22,36.2 51.57,36.27 51.87,36.47 53.13,37.73 53.33,38.03 53.4,38.38 53.4,41.42 53.33,41.77 53.13,42.07 53,42.2 53,43.4 53.93,44.33 54.13,44.63 54.2,44.98 54.2,50.45 54.13,50.8 53.93,51.1 53.4,51.63 53.1,51.83 52.75,51.9 49.85,51.9 49.85,53.59 48.11,55.33 47.81,55.53 47.46,55.6 43.4,55.6 43.4,57.5
VQUENCH on TOP (solid shape): 21.51,22.72 21.51,22.65 18.98,20.12 18.45,19.33 18.27,18.41 18.27,15.88 18.45,14.96 18.98,14.17 19.46,13.69 19.56,13.53 19.6,13.35 19.6,12.25 19.56,12.07 19.46,11.91 18.31,10.76 18.21,10.6 18.17,10.42 18.17,8.93 18.21,8.75 18.31,8.59 19.67,7.23 20.46,6.7 21.38,6.52 27.4,6.52 27.41,6.51 27.41,5.46 20.41,5.46 20.13,5.52 19.89,5.68 17.31,8.26 17.16,8.49 17.1,8.77 17.1,10.32 17.04,10.6 16.89,10.83 15.4,12.32 15.25,12.55 15.19,12.83 15.19,13.03 15.25,13.31 15.4,13.54 16.68,14.82 16.94,15.21 17.03,15.67 17.03,20.8 17.05,20.89 17.1,20.97 17.51,21.38 17.84,21.05 17.92,21 18.01,20.98 18.02,20.98 18.11,21 18.19,21.05 20.61,23.47 20.76,23.47
N00177 on TOP (solid shape): 36.2,50.1 36.11,49.64 35.85,49.25 34.87,48.27 33,48.27 33,49.4 33.85,50.25 34.11,50.64 34.2,51.1 34.2,54.2 36.2,54.2
N00181 on TOP (solid shape): 41.2,54.2 41.34,54.14 41.4,54 41.4,51.4 41.44,51.22 41.54,51.06 41.86,50.74 42.02,50.64 42.2,50.6 44.9,50.6 45.04,50.54 45.1,50.4 45.1,49.3 45.06,49.12 44.96,48.96 44.62,48.62 44.23,48.36 43.77,48.27 38.52,48.27 38.52,49.25 38.56,49.43 38.66,49.59 38.91,49.84 39.17,50.23 39.26,50.69 39.26,54.2
N00224 on TOP (solid shape): 44.42,63 44.69,62.89 44.8,62.62 44.8,59.6 41.78,59.6 41.51,59.49 41.4,59.22 41.4,56.4 33.38,56.4 33.03,56.33 32.73,56.13 31.18,54.58 31.02,54.47 30.84,54.44 28.77,54.44 28.58,54.47 28.42,54.58 26.07,56.93 25.87,57.23 25.8,57.58 25.8,61.22 25.87,61.57 26.07,61.87 26.93,62.73 27.23,62.93 27.58,63
N00671 on TOP (solid shape): 43,44.4 41.95,44.4 41.89,44.46 38.52,44.46 38.52,45.12 41.87,45.12 41.95,45.2 43,45.2
N281531 on TOP (solid shape): 35.22,46.4 35.57,46.33 35.87,46.13 36.73,45.27 36.93,44.97 37,44.62 37,43.98 37.07,43.63 37.27,43.33 40.13,40.47 40.43,40.27 40.78,40.2 48.02,40.2 48.37,40.27 48.67,40.47 49.33,41.13 49.53,41.43 49.6,41.78 49.6,43.4 52.2,43.4 52.2,42.2 50.6,42.2 50.6,41.18 50.53,40.83 50.33,40.53 48.47,38.67 48.17,38.47 47.82,38.4 40.78,38.4 40.43,38.47 40.13,38.67 36.27,42.53 36.07,42.83 36,43.18 36,44.42 35.93,44.77 35.73,45.07 35.27,45.53 34.97,45.73 34.62,45.8 33.2,45.8 33.2,46.4
N365385 on TOP (solid shape): 14.8,33.6 14.98,33.56 15.14,33.46 16.29,32.31 17.08,31.78 18,31.6 19.3,31.6 19.37,31.57 19.4,31.5 19.4,30.4 19.42,30.31 19.47,30.23 20.75,28.95 20.32,28.52 18.81,30.03 18.65,30.14 18.46,30.18 17.6,30.18 17.25,30.03 17.1,29.68 17.1,26.7 16.92,25.78 16.39,24.99 8.67,17.27 8.59,17.22 8.5,17.2 8.41,17.22 8.33,17.27 6.87,18.73 6.82,18.81 6.8,18.9 6.82,18.99 6.87,19.07 12.09,24.29 12.62,25.08 12.8,26 12.8,28.3 12.89,28.76 13.15,29.15 13.25,29.25 13.51,29.64 13.6,30.1 13.6,33.6
N365393 on TOP (solid shape): 20.09,28.27 19.47,27.65 19.47,25.18 19.29,24.26 18.76,23.47 16.36,21.07 16.1,20.68 16.01,20.22 16.01,18.36 15.92,17.9 15.66,17.51 12.18,14.03 11.6,14.03 10.18,15.45 10.18,15.92 14.62,20.36 14.72,20.52 14.76,20.7 14.76,20.99 14.8,21.17 14.9,21.33 17.73,24.16 18.26,24.95 18.44,25.87 18.44,28.34 19.23,29.13
GND on TOP (solid shape): 45.99,6.47 45.95,6.29 45.85,6.13 45.75,6.03 45.59,5.93 45.41,5.89 43.72,5.89 43.54,5.93 43.38,6.03 43.34,6.07 43.24,6.23 43.2,6.41 43.2,7.8 45.99,7.8
GND on TOP (solid shape): 21.65,27.91 21.72,27.94 21.79,27.91 22.58,27.12 22.63,27.04 22.65,26.95 22.65,26.43 22.63,26.34 22.58,26.26 20.72,24.4 20.68,24.37 20.63,24.36 20.54,24.36 20.49,24.37 20.45,24.4 20.29,24.56 20.24,24.64 20.22,24.73 20.22,26.38 20.24,26.47 20.29,26.55
GND on TOP (solid shape): 37.11,30.58 37.29,30.54 37.45,30.44 38.99,28.9 39.09,28.74 39.13,28.56 39.13,28.47 39.09,28.29 38.99,28.13 38.83,27.97 38.67,27.87 38.49,27.83 36.8,27.83 36.8,30.38 36.86,30.52 37,30.58
GND on TOP (solid shape): 29.1,49.62 29.31,49.53 29.4,49.32 29.4,46.55 28.48,46.55 28.2,46.61 27.97,46.76 26.95,47.78 26.72,47.93 26.44,47.99 25.68,47.99 25.47,48.08 25.38,48.29 25.38,49.32 25.47,49.53 25.68,49.62
GND on TOP (solid shape): 27.4,41.5 26.05,40.15 25.79,39.76 25.7,39.3 25.7,38.7 25.55,38.35 25.2,38.2 22.86,38.2 22.51,38.35 22.36,38.7 22.36,42.4 22.51,42.75 22.86,42.9 27.4,42.9
GND on TOP (solid shape): 55.92,25.69 56.1,25.65 56.26,25.55 56.55,25.26 56.65,25.1 56.69,24.92 56.69,24.53 56.65,24.35 56.55,24.19 56.42,24.06 56.26,23.96 56.08,23.92 55.94,23.92 55.76,23.88 55.6,23.78 54.76,22.94 54.34,23.36 54.34,23.37 54.64,23.67 54.74,23.83 54.78,24.01 54.78,24.76 54.82,24.94 54.92,25.1 55.37,25.55 55.53,25.65 55.71,25.69
GND on TOP (solid shape): 9.7,28.56 9.77,28.53 9.8,28.46 9.8,25 9.51,24.29 8.8,24 5.4,24 4.69,24.29 4.4,25 4.4,27.56 4.69,28.27 5.4,28.56
VDD5 on TOP (solid shape): 42.3,33.72 42.51,33.63 42.6,33.42 42.6,30.09 42.51,29.88 42.3,29.79 40.29,29.79 40.08,29.88 39.99,30.09 39.99,33.42 40.08,33.63 40.29,33.72
VDD5 on BOTTOM (solid shape): 42.1,33.72 42.45,33.57 42.6,33.22 42.6,30.29 42.45,29.94 42.1,29.79 40.49,29.79 40.14,29.94 39.99,30.29 39.99,33.22 40.14,33.57 40.49,33.72
N361468 on TOP (solid shape): 47,45 47.14,44.94 47.2,44.8 47.2,43.6 47.26,43.46 47.4,43.4 48.6,43.4 48.74,43.34 48.8,43.2 48.8,42.4 48.74,42.26 48.6,42.2 46.4,42.2 46.26,42.26 46.2,42.4 46.2,44.8 46.26,44.94 46.4,45
N371268 on TOP (solid shape): 39.52,27.62 39.61,27.61 39.69,27.55 40.3,26.94 40.33,26.87 40.3,26.8 39.54,26.04 39.31,25.89 39.03,25.83 34.8,25.83 34.8,26.97 38.42,26.97 38.7,27.03 38.93,27.18 39.3,27.55 39.38,27.61 39.48,27.62
N382943 on TOP (solid shape): 34.36,37.71 34.75,37.45 35.45,36.75 35.84,36.49 36.3,36.4 45.2,36.4 45.2,34.8 34.7,34.8 34.24,34.89 33.85,35.15 33.15,35.85 32.89,36.24 32.8,36.7 32.8,36.9 32.86,37.18 33.01,37.41 33.05,37.45 33.44,37.71 33.9,37.8

Small or netless copper shapes (teardrops, artwork), in the pictures only: 1 on BOTTOM

## Text on the board
Ref Des/Silkscreen Top: PD-SENSOR-A | DANGER | HV | SEP123
XSECTION_CHART: *  SURFACE | L1 TOP CONDUCTOR | *  DIELECTRIC | L2 BOTTOM CONDUCTOR | DESIGN CROSS SECTION CHART | ___________________________ | TOTAL THICKNESS 0.86096 MM | 1-2
DIMENSION: FIGURE | FINISHED_SIZE | 0.3 | 0.7 | 0.8 | 1.0 | 1.4 | 3.2 | DRILL CHART: TOP to BOTTOM | ALL UNITS ARE IN MILLIMETERS | PLATED | NON-PLATED | QTY | 109 | 20 | 2 | 6 | 3
